# Altium PCB PCB_1_2024-08-14.pcbdoc
Units mil, origin at the board's own origin, x right, y up, seen from the top; angles counter-clockwise.
Board outline 2874.8 x 2185.04 mil, 2 copper layers (Top Layer, Bottom Layer); 11 components, 7 nets, 36 pads, 16 vias.
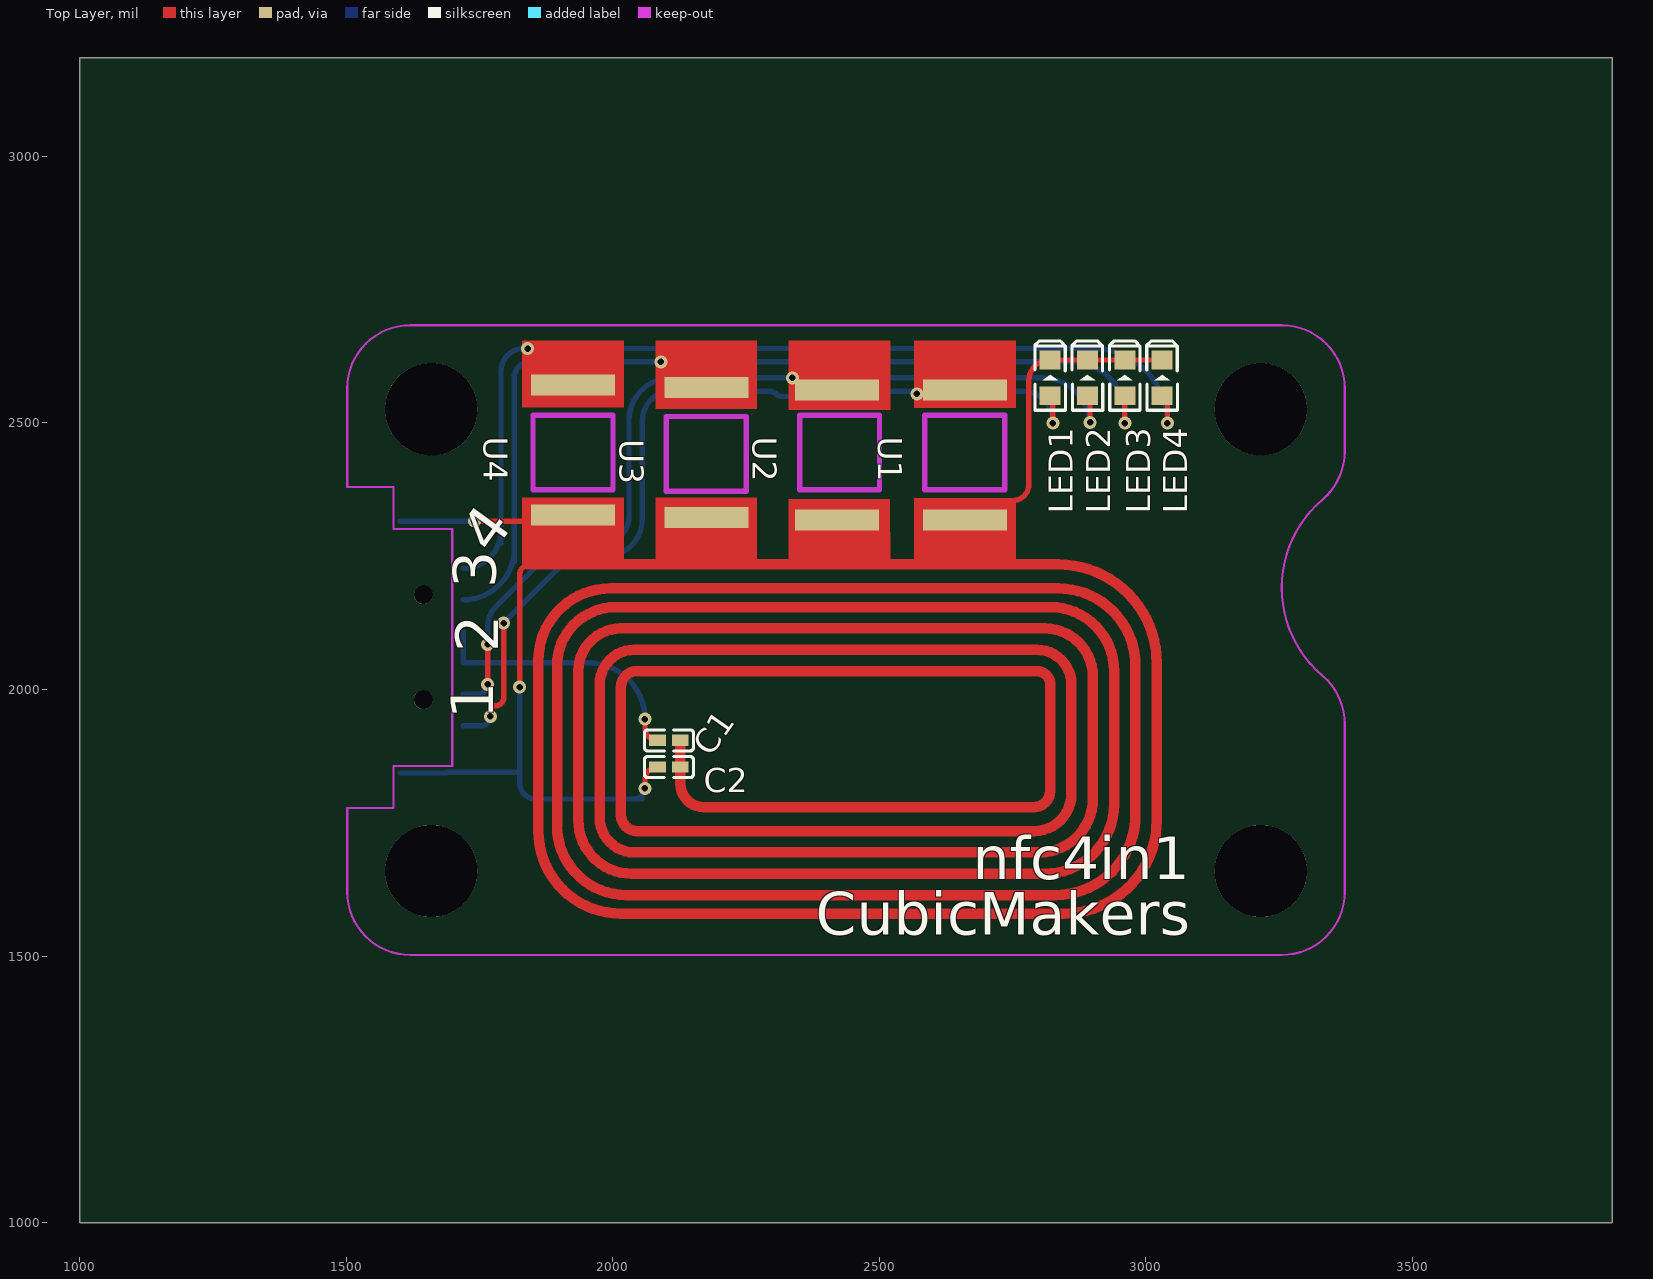
[diagram p0: Top Layer view]
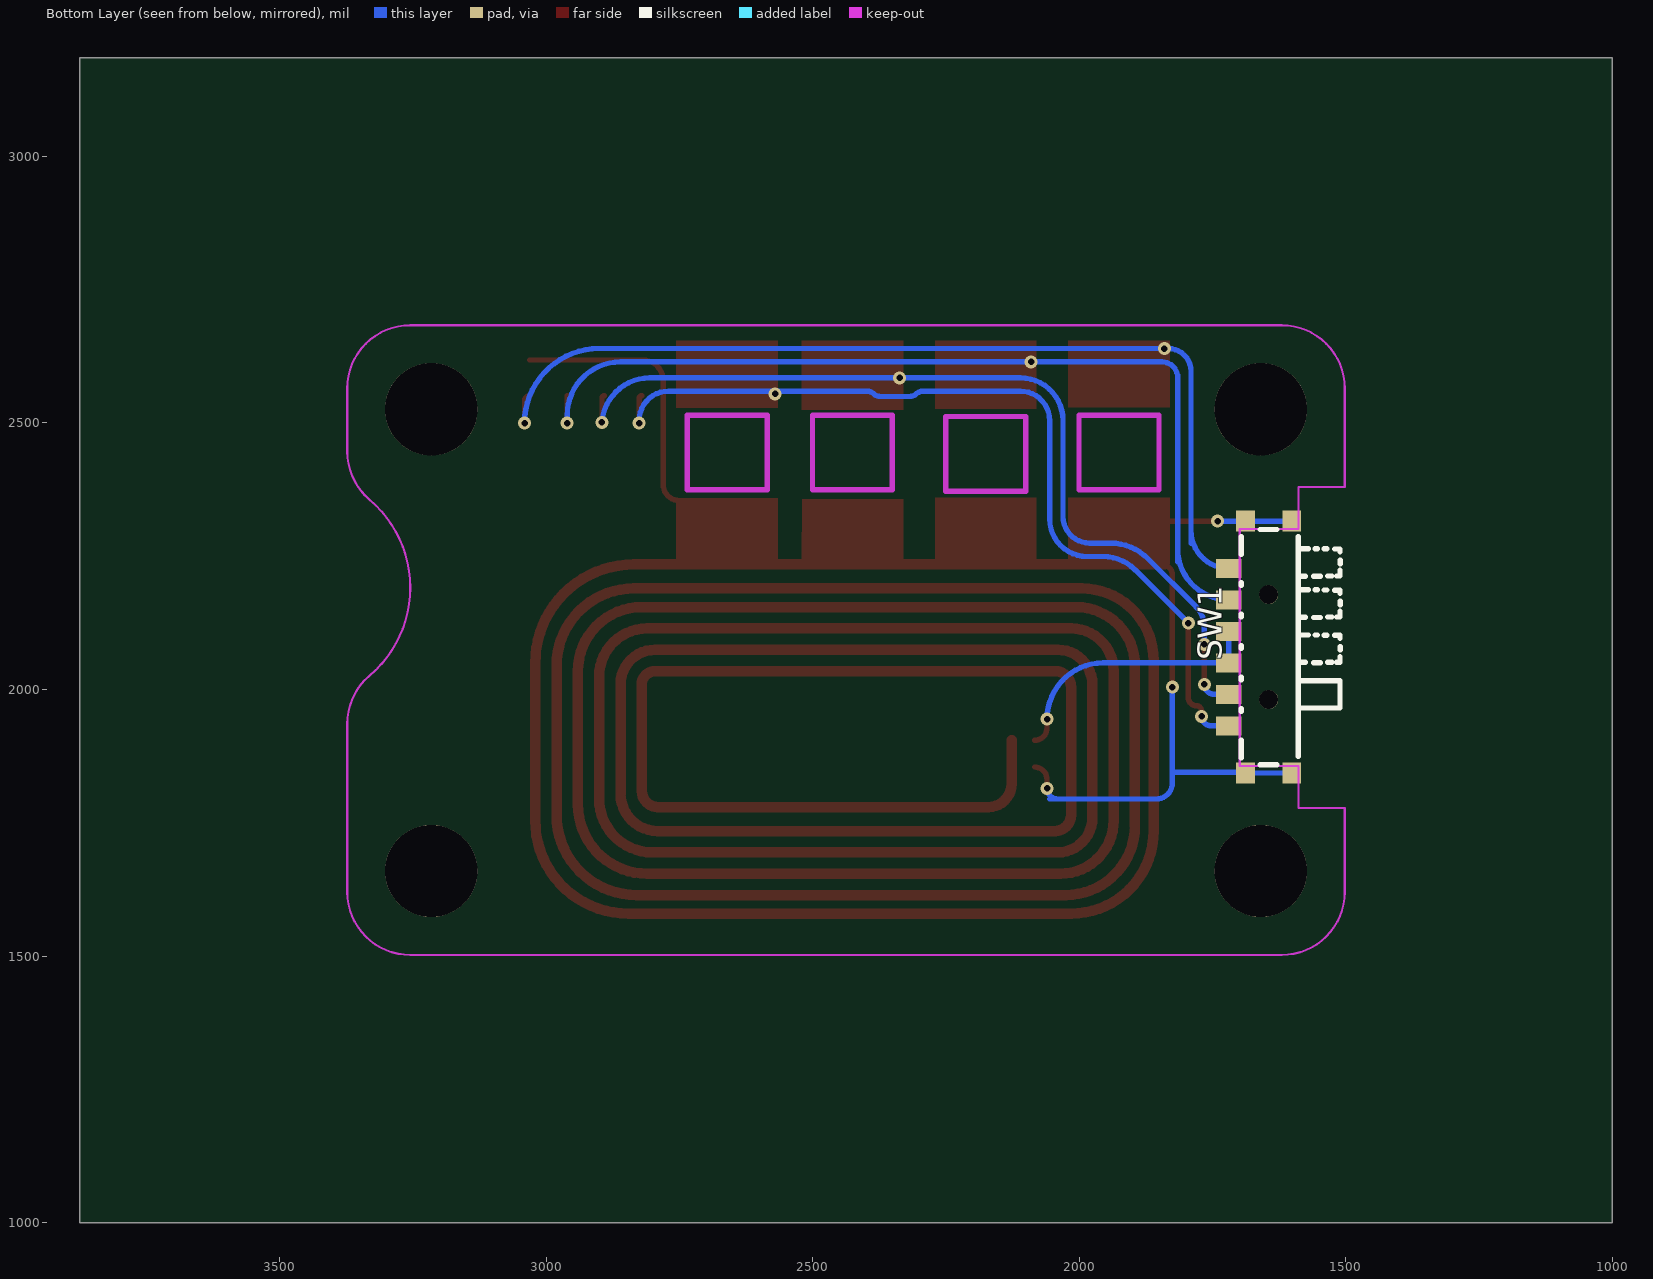
[diagram p1: Bottom Layer view, seen from below]

## Layer stack, top to bottom
Top Layer: signal copper (thickness not stored)
Dielectric: dielectric 12.6, FR-4, Dk 4.8
Bottom Layer: signal copper (thickness not stored)

## Board outline
3874.8,1000 1000,1000 1000,3185.04 3874.8,3185.04

## Components (designator, comment, footprint, x,y, rotation, side; value= is the part's Value field where it differs from the comment)
C1 "C0402" C0402 2105.34,1904.45 r180 top
C2 "C0402" C0402 2105.34,1854.45 r180 top
LED1 "LED-0603_G" LED0603_GREEN 2820.34,2584.45 r90 top
LED2 "LED-0603_G" LED0603_GREEN 2890.34,2584.45 r90 top
LED3 "LED-0603_G" LED0603_GREEN 2960.34,2584.45 r90 top
LED4 "LED-0603_G" LED0603_GREEN 3030.34,2584.45 r90 top
SW1 "MK-14C01-G2" SW-SMD_DEALON_MK-14C01-G2 1660.35,2079.45 r270 bottom
U1 "NFC-CUID-COB" NFC_CUID_COB 2660.34,2439.45 r270 top
U2 "NFC-CUID-COB" NFC_CUID_COB 2420.34,2439.45 r270 top
U3 "NFC-CUID-COB" NFC_CUID_COB 2175.34,2444.45 r270 top
U4 "NFC-CUID-COB" NFC_CUID_COB 1925.35,2449.45 r270 top

## Footprints (in the part's own frame and the unit in brackets; to place one, negate y for a bottom-side part, rotate by r counter-clockwise, add the part's x,y. Pads: shape width x height; smd on the part's side, far side on the other; paste and mask are expansions set on the pad)
C0402 [mm]
  rect 0.79x0.54 smd paste-100 mask+0.051: 1(-0.545,0) 2(0.545,0)
  silkscreen extent -1.17,-0.5 1.17,0.5
LED0603_GREEN [mm]
  rect 0.9x1 smd paste+0 mask+0.051: 1(-0.85,0) 2(0.85,0)
  silkscreen extent -1.54,-0.73 1.75,0.73
NFC_CUID_COB [mm]
  rect 1x4 smd paste+0 mask+0.051: 1(-3.1,0) 2(3.1,0)
SW-SMD_DEALON_MK-14C01-G2 [mm]
  rect 0.9x1.2 smd paste+0 mask+0.05: 1(3.75,-1.5) 2(2.25,-1.5) 3(0.75,-1.5) 4(-0.75,-1.5) 5(-2.25,-1.5) 6(-3.75,-1.5)
  rect 1x0.9 smd paste+0 mask+0.05: 7(-6,-0.7) 8(-6,1.5) 9(6,1.5) 10(6,-0.7)
  round 0.9 hole 0.9 unplated paste+0: ""(-2.5,0.4) ""(2.5,0.4)
  silkscreen extent -5.6,-0.9 5.6,3.81

## Free pads (board coordinates)
  round 173.23 hole 173.23 unplated paste+0: ""(1659.45,1659.45) ""(1659.45,2525.59) ""(3215.34,1659.45) ""(3215.34,2525.59)

## Via types
v1: diameter 24.41, hole 12.2, Top Layer to Bottom Layer, tented both sides, 16 vias

## Nets (pads, with @x,y where several pads share a name; then routed paths per layer and width w, separated by ;. In a path a pad name is that pad's centre, name@x,y a point inside that pad or via, vN(x,y) a via of type N, cw(c..) or ccw(c..) an arc to the next point about the centre after c; other vN are vias at no path point)
GND: C1.1 C2.1 C2.2 LED1.2 LED2.2 LED3.2 LED4.2 SW1.7 SW1.8 SW1.9 SW1.10 U1.2 U2.2 U3.2 U4.2 | length 17645.7
  Top Layer w10: v1(1740.35,2315.67) 1835.35,2315.67 1835.35,2314.45 ; v1(1825.35,2004.45) 1825.35,2214.45 cw(c1845.35,2214.45) 1845.35,2234.45 ; v1(2060.34,1814.45) 2060.34,1830.91 cw(c2083.89,1830.91) C2.2 ; 2750.34,2354.45 ccw(c2750.34,2384.45) 2780.34,2384.45 2780.34,2579.45 cw(c2818.8,2579.45) 2818.8,2617.91 LED1.2 LED4.2
  Top Layer w19.68: 1840.35,2234.45 2835.34,2234.45 cw(c2835.34,2049.45) 3020.34,2049.45 3020.34,1754.45 cw(c2845.34,1754.45) 2845.34,1579.45 2015.35,1579.45 cw(c2015.35,1734.45) 1860.35,1734.45 1860.35,2054.45 cw(c1995.35,2054.45) 1995.35,2189.45 2048.24,2189.45 2835.34,2189.45 cw(c2835.34,2044.45) 2980.34,2044.45 2980.34,1883.65 2980.34,1764.45 cw(c2830.34,1764.45) 2830.34,1614.45 2025.35,1614.45 cw(c2025.35,1744.45) 1895.35,1744.45 1895.35,2044.45 cw(c2005.35,2044.45) 2005.35,2154.45 2820.34,2154.45 cw(c2820.34,2034.45) 2940.34,2034.45 2940.34,1784.45 cw(c2810.34,1784.45) 2810.34,1654.45 2035.35,1654.45 cw(c2035.35,1754.45) 1935.35,1754.45 1935.35,2034.45 cw(c2015.35,2034.45) 2015.35,2114.45 2810.34,2114.45 cw(c2810.34,2024.45) 2900.34,2024.45 2900.34,1794.45 cw(c2800.34,1794.45) 2800.34,1694.45 2040.35,1694.45 cw(c2040.35,1759.45) 1975.35,1759.45 1975.35,2009.45 cw(c2040.35,2009.45) 2040.35,2074.45 2795.34,2074.45 cw(c2795.34,2009.45) 2860.34,2009.45 2860.34,1804.45 cw(c2790.34,1804.45) 2790.34,1734.45 2045.35,1734.45 cw(c2045.35,1764.45) 2015.35,1764.45 2015.35,2004.45 cw(c2045.35,2004.45) 2045.35,2034.45 2055.34,2034.45 2795.34,2034.45 cw(c2795.34,2009.45) 2820.34,2009.45 2820.34,2004.45 2820.34,1814.45 2820.34,1809.45 cw(c2790.34,1809.45) 2790.34,1779.45 2310.14,1779.45 2170.34,1779.45 cw(c2170.34,1822.99) 2126.8,1822.99 C2.1 C1.1
  Bottom Layer w10: SW1.9 SW1.10 cw(c1689.12,1843.23) 1689.12,1844.45 1825.35,1844.45 ; SW1.8 SW1.7 v1(1740.35,2315.67) v1@1740.35,2314.45 ; v1(1825.35,2004.45) 1825.35,1844.45 ; 2040.35,1794.45 ccw(c2040.35,1814.45) v1(2060.34,1814.45) ; 2055.34,1794.45 1855.35,1794.45 cw(c1855.35,1824.45) 1825.35,1824.45 1825.35,1844.45
S$3768: 
SW1_1: LED1.1 SW1.1 U1.1 | length 1675.9
  Top Layer w10: v1(1770.35,1949.45) 1770.35,1959.45 cw(c1780.35,1959.45) 1780.35,1969.45 ccw(c1780.35,1984.45) 1795.35,1984.45 v1(1795.35,2124.45) ; LED1.1 cw(c2820.34,2545.98) 2825.34,2545.98 v1(2825.34,2499.45)
  Bottom Layer w10: SW1.1 1752.7,1931.81 ccw(c1752.7,1949.45) v1(1770.35,1949.45) ; v1(1795.35,2124.45) 1895.6,2224.7 cw(c1955.34,2164.95) 1955.34,2249.45 1985.35,2249.45 ccw(c1985.35,2319.45) 2055.35,2319.45 2055.34,2504.45 cw(c2110.34,2504.45) 2110.34,2559.45 2285.34,2559.45 2293.27,2559.45 cw(c2293.27,2542.38) 2305.35,2554.45 ccw(c2317.42,2566.52) 2317.42,2549.45 2370.34,2549.45 2373.27,2549.45 ccw(c2373.27,2566.52) 2385.35,2554.45 cw(c2397.42,2542.38) 2397.42,2559.45 2765.34,2559.45 2770.34,2559.45 cw(c2770.34,2504.45) v1@2825.34,2504.45
  other v1: 2570.34,2554.45
SW1_2: LED2.1 SW1.2 U2.1 | length 1724.4
  Top Layer w10: v1(1765.35,2009.45) v1(1765.35,2084.45) ; LED2.1 cw(c2890.34,2546.21) 2895.12,2546.21 v1@2895.12,2500.85
  Bottom Layer w10: SW1.2 1746.76,1990.86 ccw(c1746.76,2009.45) v1(1765.35,2009.45) ; v1(1765.35,2084.45) 1765.35,2118.24 cw(c1816.56,2118.24) 1780.35,2154.45 1871.45,2245.56 cw(c1941.2,2175.81) 1941.2,2274.45 1975.35,2274.45 1980.35,2274.45 ccw(c1980.35,2324.45) 2030.35,2324.45 2030.35,2504.45 cw(c2110.34,2504.45) 2110.34,2584.45 v1(2336.97,2584.45) 2765.34,2584.45 2805.34,2584.45 cw(c2805.34,2494.45) v1@2895.34,2494.45
  other v1: 2895.11,2500.85
SW1_4: C1.2 SW1.3 SW1.4 | length 513.6
  Top Layer w10: v1(2060.34,1944.45) 2060.34,1927.99 ccw(c2083.89,1927.99) C1.2
  Bottom Layer w10: SW1.4 SW1.3 1954.88,2049.92 cw(c1954.88,1944.45) v1(2060.34,1944.45)
SW1_5: LED3.1 SW1.5 U3.1 | length 1790.7
  Top Layer w10: v1(2960.34,2499.45) LED3.1
  Bottom Layer w10: SW1.5 ccw(c1719.4,2263.97) 1815.35,2263.97 ; 1815.35,2239.45 1815.35,2584.93 ; v1(2960.34,2499.45) 2960.34,2514.45 ccw(c2860.34,2514.45) 2860.34,2614.45 2855.34,2614.45 v1(2090.34,2614.45) 1855.35,2614.45 1844.87,2614.45 ccw(c1844.87,2584.93) 1815.35,2584.93 ; 1815.35,2584.93 1815.35,2589.45 1815.35,2584.93
SW1_6: LED4.1 SW1.6 U4.1 | length 1837.8
  Top Layer w10: LED4.1 cw(c3030.34,2540.98) 3040.34,2540.98 v1(3040.34,2499.45)
  Bottom Layer w10: SW1.6 ccw(c1719.4,2298.02) 1790.35,2298.02 ; 1790.35,2274.45 1790.35,2595.88 1790.35,2596.95 cw(c1832.85,2596.95) v1@1832.85,2639.45 ; v1(1840.35,2639.45) 2807.84,2639.45 2900.34,2639.45 cw(c2900.34,2499.45) v1(3040.34,2499.45)
pads on no net: SW1.

## Keep-outs
Keep-Out Layer:
  lines w3.94: 1501.97,1620.08 ccw(c1620.08,1620.08) 1620.08,1501.97 ; 1501.97,2564.96 cw(c1620.08,2564.96) 1620.08,2683.07 ; 3254.72,1501.97 ccw(c3254.72,1620.08) 3372.83,1620.08 ; 3254.72,2683.07 cw(c3254.72,2564.96) 3372.83,2564.96 ; 3372.83,1935.8 ccw(c3254.72,1935.8) 3331.14,2025.85 cw(c3471.25,2190.95) 3331.14,2356.04 ccw(c3254.72,2446.09) 3372.83,2446.09

## Other copper
Top Layer:
  region net SW1_1: 2565.34,2654.45 2565.55,2528.7 2755.55,2528.7 2755.34,2654.45
  region net SW1_2: 2330.34,2654.45 2330.34,2524.45 2520.34,2524.45 2520.34,2654.45
  region net GND: 2565.55,2358.7 2565.34,2234.45 2755.34,2234.45 2755.55,2358.7 2725.55,2358.7
  region net GND: 2329.76,2356.49 2330.34,2234.45 2520.34,2234.45 2519.76,2356.49 2489.76,2356.49
  region net GND: 2080.34,2359.45 2080.34,2234.45 2270.34,2234.45 2270.34,2359.45
  region net SW1_5: 2080.34,2654.45 2080.34,2526.95 2270.34,2526.95 2270.34,2654.45
  region net GND: 1830.35,2359.45 1830.35,2234.45 2020.35,2234.45 2020.35,2359.45 1990.35,2359.45
  region net SW1_6: 1830.35,2654.45 1830.35,2529.45 2020.35,2529.45 2020.35,2654.45

## Silkscreen, mask and mechanical layers (free items; w line width, h text height)
Top Overlay:
  text "4" at 1772.71,2250.94 h80 r54
  text "3" at 1780.35,2189.45 h80 r90
  text "2" at 1785.35,2069.45 h80 r90
  text "1" at 1775.35,1944.45 h80 r90
  text "nfc4in1" at 2675.34,1644.45 h80
  text "CubicMakers" at 2380.34,1539.45 h80
Top Solder:
  rectangle: 1830.35,2244.45 2020.35,2654.45
  rectangle: 2080.34,2244.45 2270.34,2654.45
  rectangle: 2330.34,2244.45 2520.34,2654.45
  rectangle: 2565.34,2244.45 2755.34,2654.45
Document:
  lines w3.94: 2841.33,2332.68 2939.75,2332.68 2939.75,2368.11 2841.33,2368.11 2841.33,2332.68 ; 2841.33,2411.42 2939.75,2411.42 2939.75,2446.85 2841.33,2446.85 2841.33,2411.42 ; 2841.33,2490.16 2939.75,2490.16 2939.75,2525.59 2841.33,2525.59 2841.33,2490.16 ; 2841.33,2568.9 2939.75,2568.9 2939.75,2604.33 2841.33,2604.33 2841.33,2568.9
  lines w19.68 net GND: 1840.35,2229.45 3021.05,2229.45 3021.05,1579.75 1859.64,1579.75 1859.64,2189.45 2981.64,2189.45 2981.64,1619.05 1899.05,1619.05 1899.05,2150.55 2942.34,2150.55 2942.34,1658.45 1938.35,1658.45 1938.35,2111.25 2902.95,2111.25 2902.95,1697.85 1977.74,1697.85 1977.74,2071.85 2863.55,2071.85 2863.55,1737.25 2017.14,1737.25 2017.14,2032.45 2820.34,2034.45 2820.34,1779.45 2090.34,1779.45